# EAGLE board TestResitorArraySmd (EAGLE 7.6.0)

Size 28 x 24 mm. Coordinates in mm from the lower left corner, seen from the top.
Outline: 0,0 28,0 28,24 0,24 0,0
Copper layers (1*16): Top 0.035mm / dielectric 1.5mm / Bottom 0.035mm
Design rules "default": minimum track width 10mil, minimum drill 24mil, track to track 8mil, track to pad 8mil, pad to pad 8mil, via to via 8mil, smd to smd 8mil, copper to edge 40mil, drill to drill 8mil, minimum pad ring 10mil, minimum via ring 8mil, stop-mask expansion 4mil, vias tented up to drill 0mil, thermal gap 10mil

## Footprints (pad centres in the part's own frame; a part is rotated, then mirrored left to right if it is on the bottom)
1206 = smd 1.6 x 1.803: A -1.422,0; C 1.422,0
1X10_SMD_MALE = smd 1.02 x 6: 1 0,0; 2 2.54,0; 3 5.08,0; 4 7.62,0; 5 10.16,0; 6 12.7,0; 7 15.24,0; 8 17.78,0; 9 20.32,0; 10 22.86,0
MOLEX_480371000 = smd 1.2 x 2: 1 3.5,2.6; 2 1,2.6; 3 -1,2.6; 4 -3.5,2.6 | drill 2.5: M1 -5.7,0; M2 5.7,0 | hole 1.1: -2.25,0; 2.25,0

## Placement (x,y rotation side)
LED1  [1206]  12.5,21 270 top
LED2  [1206]  8.5,21 270 top
LED3  [1206]  16.5,21 270 top
LED4  [1206]  20.5,21 270 top
RA_9  [1X10_SMD_MALE]  26,14.5 180 top
X1  USB-A  [MOLEX_480371000]  13.5,3 0 top

## Library data of the parts
LED1-LED4 X1 = adafruit
RA_9 = SparkFun-Connectors; PROD_ID: CONN-11291

## Nets
GND: RA_9.10 X1.4
N$1: LED2.C RA_9.9
N$2: LED1.C RA_9.8
N$3: LED3.C RA_9.7
N$4: LED4.C RA_9.6
VCC: LED1.A LED2.A LED3.A LED4.A X1.1

## Tracks (layer width: path | path; a pad name or v marks a point on that pad's centre or on a via)
GND  (1 unrouted)
N$1  (1 unrouted)
N$2  (1 unrouted)
N$3  (1 unrouted)
N$4  (1 unrouted)
VCC  (4 unrouted)

## Text on the board
tNames: + | GND